# Altium PCB PCB1.PcbDoc
Units mil, origin at the board's own origin, x right, y up, seen from the top; angles counter-clockwise.
Board outline 3740.16 x 1062.99 mil, 2 copper layers (Top Layer, Bottom Layer); 15 components, 7 nets, 35 pads, 0 vias.
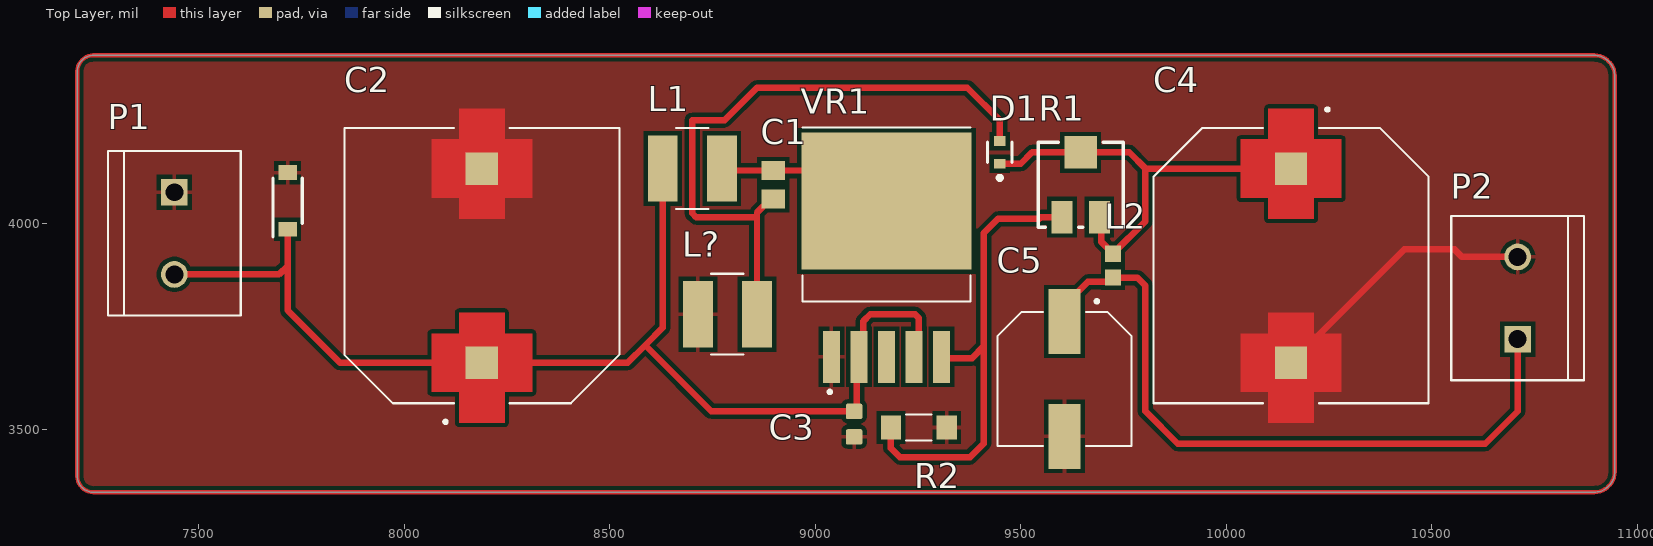
[diagram p0: Top Layer view]
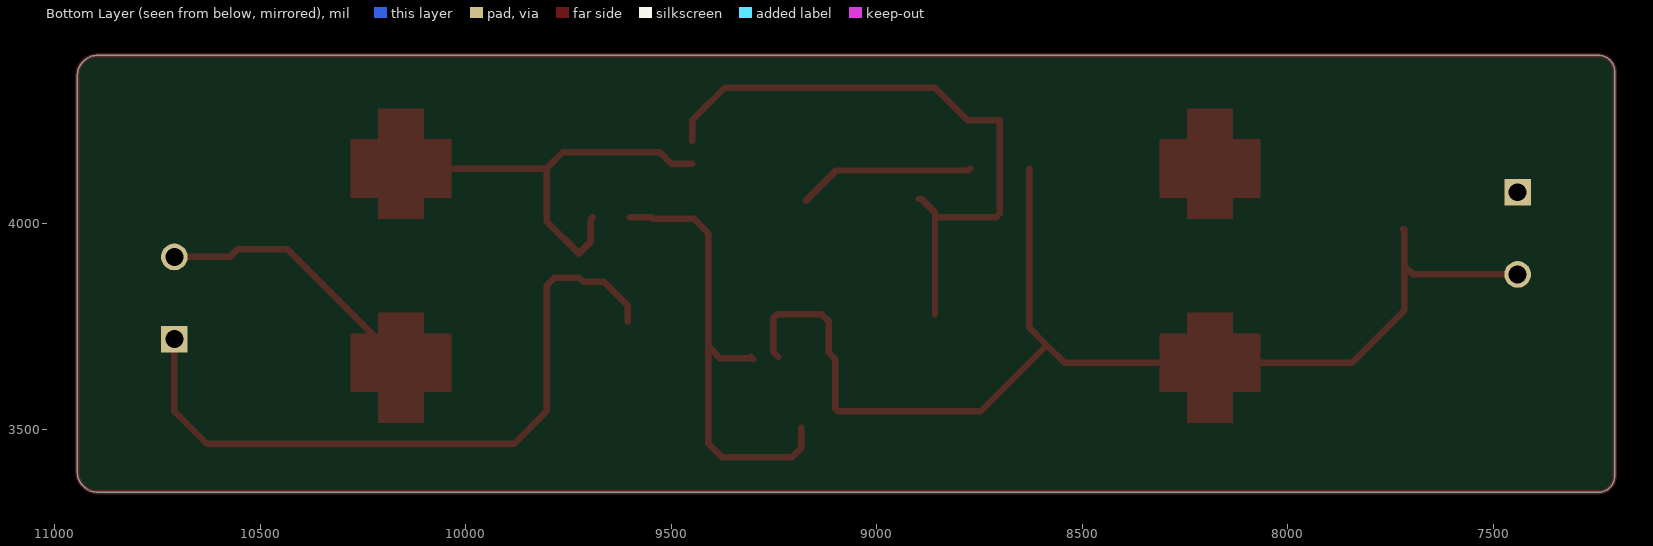
[diagram p1: Bottom Layer view, seen from below]
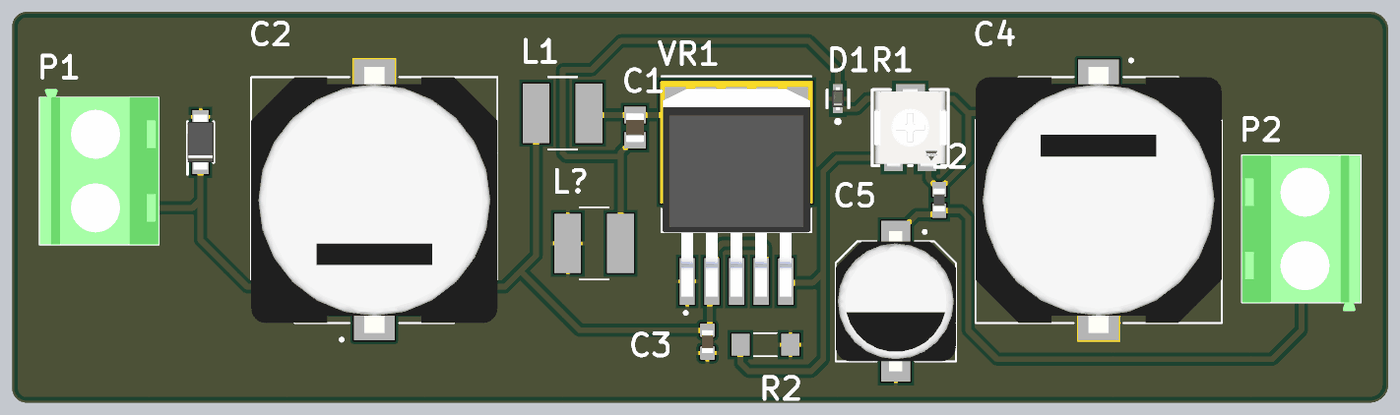
[diagram p2: 3D render of the assembled board from above, using the file's embedded part models]

## Layer stack, top to bottom
Top Solder: solder mask 0.4, Solder Resist, Dk 3.5
Top Layer: signal copper 1.4
Dielectric 1: dielectric 12.6, FR-4, Dk 4.8
Bottom Layer: signal copper 1.4
Bottom Solder: solder mask 0.4, Solder Resist, Dk 3.5

## Board outline
7204.72,3385.83 ccw(c7244.09,3385.83) 7244.09,3346.46 10894.88,3346.46 ccw(c10894.88,3396.46) 10944.88,3396.46 10944.88,4359.45 ccw(c10894.88,4359.45) 10894.88,4409.45 7244.09,4409.45 ccw(c7244.09,4370.08) 7204.72,4370.08

## Design rules (kind name [scope] priority, off if disabled: settings)
Clearance [All] p1: gap=10 ignorepadtopadclearanceinfootprint=FALSE
PolygonConnect [All] p1: connectstyle=Relief reliefconductorwidth=10 reliefentries=4 polygonreliefangle="90 Angle" airgapwidth=10
RoutingVias [All] p1: holewidth=28 width=50 viastyle="Through Hole" minholewidth=19.68 minwidth=50 maxholewidth=39.37 maxwidth=50
SolderMaskExpansion [All] p1: expansion=4 istentingtop=FALSE
Width [All] p1: maxlimit=29.92 minlimit=10 preferedwidth=15.75
30 further rules are at their usual default settings.

## Components (designator, comment, footprint, x,y, rotation, side; value= is the part's Value field where it differs from the comment)
C1 "C2012X7S2A105M125AB" CAPC2012X145N 8897.64,4094.49 r270 top
C2 "EEVFK1V102V" CAP_EEVFK1V102V 8188.98,3897.64 r90 top
C3 "MBJCG168BB7104KTPA18" CAPC1608X100N 9094.49,3512.2 r270 top
C4 "EEVFK1V102V" CAP_EEVFK1V102V 10157.48,3897.64 r270 top
C5 "EEEFK1V101GL" CAP_EEEFK1V101GL 9606.3,3622.05 r270 top
D1 "SDM20U30-7" FP-SOD523-MFG 9448.82,4173.23 r90 top value=20pF
L1 "LQH5BPH330MT0L" IND_LQH5BPH330MT0L 8700.79,4133.86 r0 top
L2 "LQM18DN100M70L" INDC1608X95N 9724.41,3897.64 r270 top
L? "LQH5BPH330MT0L" IND_LQH5BPH330MT0L 8786.42,3779.53 r0 top
P1 "282837-2" TE_282837-2 7440.94,3976.38 r270 top
P2 "282837-2" TE_282837-2 10708.66,3818.9 r90 top
R1 "TS53YJ203MR10" FP-TS53YJ-MFG 9645.67,4094.49 r0 top
R2 "ERA8ARW222V" RES_ERA8ARW222V 9251.97,3503.94 r180 top
VR1 "XL6009" DPAK170P1435X465-6N 9173.23,3917.32 r90 top
? "1N4007W-T" SODFL3818X130N 7716.54,4055.12 r90 top

## Footprints (in the part's own frame and the unit in brackets; to place one, negate y for a bottom-side part, rotate by r counter-clockwise, add the part's x,y. Pads: shape width x height; smd on the part's side, far side on the other; paste and mask are expansions set on the pad)
CAP_EEEFK1V101GL [mm]
  rect 4x2 smd: 1(-3.55,0) 2(3.55,0)
  silkscreen extent -4.9,-4.15 4.15,4.15, body extent -4.85,-4.15 4.85,4.15, height 10.2
CAP_EEVFK1V102V [mm]
  rect 2x2 smd paste-2 mask+0: 1(-6,0) 2(6,0)
  Top Layer region: -4.2,1.4 -2.9,1.4 -2.9,-1.4 -4.2,-1.4 -4.2,-3.1 -7.8,-3.1 -7.8,-1.4 -9.7,-1.4 -9.7,1.4 -7.8,1.4 -7.8,3.1 -4.2,3.1
  Top Layer region: 7.8,1.4 9.7,1.4 9.7,-1.4 7.8,-1.4 7.8,-3.1 4.2,-3.1 4.2,-1.4 2.9,-1.4 2.9,1.4 4.2,1.4 4.2,3.1 7.8,3.1
  silkscreen extent -9.75,-8.5 8.5,8.5, body extent -9.2,-8.5 9.2,8.5, height 16.8
CAPC1608X100N [mm]
  rrect25% 0.95x1.03 smd: 1(-0.79,0) 2(0.79,0)
  body extent -0.8,-0.4 0.8,0.4, height 1
CAPC2012X145N [mm]
  rect 1.15x1.47 smd: 1(-0.88,0) 2(0.88,0)
  body extent -1,-0.63 1,0.63, height 1.45
DPAK170P1435X465-6N [mm]
  rect 3.21x1.05 smd: 1(-6.13,3.4) 2(-6.13,1.7) 3(-6.13,0) 4(-6.13,-1.7) 5(-6.13,-3.4)
  rect 8.46x10.53 smd paste-6: 6(3.5,0)
  silkscreen extent -8.4,-5.18 8.05,5.18, body extent -7.17,-5.08 7.17,5.08, height 4.65
FP-SOD523-MFG [mm]
  rect 0.6x0.7 smd paste+0 mask+0: 1(-0.7,0) 2(0.7,0)
  silkscreen extent -1.7,-0.75 0.63,0.75, body extent -1.1,-0.53 1.1,0.53, height 0.25
FP-TS53YJ-MFG [mm]
  rect 1.3x2 smd paste+0 mask+0: 1(1.15,-2) 3(-1.15,-2)
  rect 2x2 smd paste+0 mask+0: 2(0,2)
  silkscreen extent -2.63,-2.63 2.63,2.63, body extent -2.73,-3.1 2.73,3.1, height 0.25
IND_LQH5BPH330MT0L [mm]
  rect 1.85x4.1 smd: 1(-1.825,0) 2(1.825,0)
  silkscreen extent -1,-2.5 1,2.5
INDC1608X95N [mm]
  rect 1x0.97 smd: 1(-0.735,0) 2(0.735,0)
  body extent -0.8,-0.4 0.8,0.4, height 0.95
RES_ERA8ARW222V [mm]
  rect 1.25x1.5 smd: 1(-1.725,0) 2(1.725,0)
  silkscreen extent -0.78,-0.8 0.78,0.8
SODFL3818X130N [mm]
  rect 0.92x1.13 smd paste+0 mask+0.102: 1(-1.75,0) 2(1.75,0)
  silkscreen extent -2.21,-0.9 1.4,0.9, body extent -1.9,-0.9 1.9,0.9, height 1.3
TE_282837-2 [mm]
  rect 1.65x1.65 / inner round 1.65 / far side rect 1.65x1.65 hole 1.1: 1(-2.54,0)
  round 1.65 hole 1.1: 2(2.54,0)
  silkscreen extent -5.08,-4.1 5.08,4.1, body extent -5.68,-4.1 5.08,4.1, height 10

## Part data
C1: "1 ÂµF Â±20% 100V Ceramic Capacitor X7S 0805 (2012 Metric)", Package="2012 TDK", Availability="In Stock", Check_prices=https://www.snapeda.com/parts/C2012X7S2A105M125AB/TDK/view-part/?ref=eda, MF=TDK, MP=C2012X7S2A105M125AB, Price=None, Purchase-URL=https://pricing.snapeda.com/search/part/C2012X7S2A105M125AB/?ref=eda, SnapEDA_Link=https://www.snapeda.com/parts/C2012X7S2A105M125AB/TDK/view-part/?ref=snap
C2 C4: "1000ÂµF 35V Aluminum Electrolytic Capacitors Radial, Can - SMD 5000 Hrs @ 105Â°C", Package="RADIAL-2 Panasonic", Availability="In Stock", Check_prices=https://www.snapeda.com/parts/EEV-FK1V102V/Panasonic/view-part/?ref=eda, MF=Panasonic, MP=EEV-FK1V102V, Price=None, Purchase-URL=https://pricing.snapeda.com/search/part/EEV-FK1V102V/?ref=eda, SnapEDA_Link=https://www.snapeda.com/parts/EEV-FK1V102V/Panasonic/view-part/?ref=snap
C3: "0.1uF 35V 10% Multilayer Ceramic Capacitor X7R 0603 (1608 Metric)", Package="1608-2 TAIYO", Check_prices=https://www.snapeda.com/parts/MBJCG168BB7104KTPA18/Taiyo+Yuden/view-part/?ref=eda, MF="Taiyo Yuden", MP=MBJCG168BB7104KTPA18, SnapEDA_Link=https://www.snapeda.com/parts/MBJCG168BB7104KTPA18/Taiyo+Yuden/view-part/?ref=snap
C5: "CAP ALUM 100UF 20% 35V SMD", Package="RADIAL-2 Panasonic", Check_prices=https://www.snapeda.com/parts/EEEFK1V101GL/Panasonic/view-part/?ref=eda, MF=Panasonic, MP=EEEFK1V101GL, SnapEDA_Link=https://www.snapeda.com/parts/EEEFK1V101GL/Panasonic/view-part/?ref=snap
D1: library part CMP-12790-000053-1, "DIODE SCHOTTKY 30V 200MA SOD523", Capacitance=20pF, Forward Current=200mA, Manufacturer="Diodes Inc.", Max Junction Temp=+125°C, Max Repetitive Reverse Voltage=30V, Max Surge Forward Current=1A, Package=SOD523, Peak Reverse Current=150uA, Temperature="-65°C to +125°C", Temperature Range Low=-65°C, Automotive=Yes, Automotive Grade="Grade 1", Category=Diode, ComponentLink2Description=Datasheet, ComponentLink2URL=https://www.diodes.com/assets/Datasheets/ds30397.pdf, Device Class L1="Discrete Semiconductors", Device Class L2=Diodes, Device Class L3="Schottky Diodes", Digikey Description="DIODE SCHOTTKY 30V 200MA SOD523", Footprint Url=https://www.diodes.com/assets/Package-Files/SOD523.pdf, Height=0.65mm, Lead Free=Yes, Manufacturer Part Number=SDM20U30-7, Mouser Description="SDM20U30 Series 20 V 200 mA Surface Mount Schottky Barrier Diode - SOD-523", Octopart=https://octopart.com/sdm20u30-7-diodes+inc.-333874, Reverse Voltage=30V, RoHS=TRUE, Temperature Range High=+125°C
L1 L?: "Inductor Power Chip Shielded Wirewound 4.7uH 30% 100KHz Ferrite 2A 0.0696Ohm DCR 2020 Automotive T/R", Package=None, Availability=Unavailable, MP=LQH5BPH330MT0L, Price=None
L2: "Inductor with Inductance 10uH Tol.+/-20% Package 0603 (1608)", Package="0603 Murata", Check_prices=https://www.snapeda.com/parts/LQM18DN100M70L/Murata/view-part/?ref=eda, MF="Murata Electronics", MP=LQM18DN100M70L, SnapEDA_Link=https://www.snapeda.com/parts/LQM18DN100M70L/Murata/view-part/?ref=snap
P1 P2: "Ð Ð°Ð·ÑŠÐµÐ¼Ð½Ñ‹Ðµ ÐºÐ»ÐµÐ¼Ð¼Ð½Ñ‹Ðµ ÐºÐ¾Ð»Ð¾Ð´ÐºÐ¸ Ð Ð¾Ð·ÐµÑ‚ÐºÐ° 2 Ð¿Ð¾Ð»Ð¾Ð¶ÐµÐ½Ð¸Ñ 5,08 Ð¼Ð¼ ÐŸÑ€Ð¸Ð¿Ð¾Ð¹ Ð¿Ñ€ÑÐ¼Ð¾Ð¹ Ñ‡ÐµÑ€ÐµÐ· Ð¾Ñ‚Ð²ÐµÑ€ÑÑ‚Ð¸Ðµ 13,5 Ð / ÐºÐ¾Ð½Ñ‚Ð°ÐºÑ‚", Package=None, Availability="In Stock", Check_prices=https://www.snapeda.com/parts/282837-2/TE+Connectivity+AMP+Connectors/view-part/?ref=eda, MF="TE Connectivity", MP=282837-2, Price=None, Purchase-URL=https://pricing.snapeda.com/search/part/282837-2/?ref=eda, SnapEDA_Link=https://www.snapeda.com/parts/282837-2/TE+Connectivity+AMP+Connectors/view-part/?ref=snap
R1: library part CMP-02410-000009-1, "TRIMMER 20K OHM 0.25W J LEAD TOP", Max Operating Temperature=125°C, Max Power Dissipation=250mW, Min Operating Temperature=-55°C, Package Quantity=1, Resistance=20kR, Resistance Tolerance=20%, Resistor Type=Cermet, Temperature Coefficient=100ppm/°C, Depth=5.5mm, Height=0.106inch, Length=5mm, Military Standard=Not, Mount="Surface Mount", Number of Turns=1, Packaging="Tape and Reel", Power Rating=250mW, Radiation Hardening=No, RoHS Compliant=Yes, Series=TS53Y, Taper=Linear, Technology=CERMET, Termination=SMD/SMT, Tolerance=20%, Width=5mm
R2: Package=None, Availability=Unavailable, MP=ERA8ARW222V, Price=None
VR1: "The XL6009 regulator is a wide input range, current mode, DC/DC converter which is capable of generating either positive or negative output voltages.", Package="TO-263-5L XLSEMI", Availability="Not in stock", Check_prices=https://www.snapeda.com/parts/XL6009/XLSEMI/view-part/?ref=eda, MF=XLSEMI, MP=XL6009, Price=None, SnapEDA_Link=https://www.snapeda.com/parts/XL6009/XLSEMI/view-part/?ref=snap
?: "Diode Standard 1000 V 1A Surface Mount SOD-123F", Package=Package, Check_prices=https://www.snapeda.com/parts/1N4007W/Rectron/view-part/?ref=eda, MF="Rectron USA", MP=1N4007W, SnapEDA_Link=https://www.snapeda.com/parts/1N4007W/Rectron/view-part/?ref=snap

## Nets (pads, with @x,y where several pads share a name; then routed paths per layer and width w, separated by ;. In a path a pad name is that pad's centre, name@x,y a point inside that pad or via, vN(x,y) a via of type N, cw(c..) or ccw(c..) an arc to the next point about the centre after c; other vN are vias at no path point)
GND: ?.2 C2.2 C3.2 C4.2 C5.2 L?.1 P1.1 P2.2 R2.1 VR1.1 | length 672.8
  Top Layer w15.75: C4.2 10433.07,3937.01 10555.15,3937.01 10573.26,3918.9 P2.2
"Net _1": ?.1 C2.1 C3.1 L1.1 P1.2 VR1.2 VR1.4 | length 2922.1
  Top Layer w15.75: P1.2 7695.28,3876.38 7716.54,3897.64 ; ?.1@7720.67,3986.22 ?.1 7716.54,3897.64 ; L1.1 8628.94,3747.05 8586.12,3704.23 ; VR1.4 9251.97,3687.8 9251.97,3770.3 9242.74,3779.53 9133.86,3779.53 9117.13,3762.8 9117.13,3686.81 VR1.2 9100.39,3670.08 9100.39,3549.21 C3.1 8747.05,3543.31 8586.12,3704.23 ; 7716.54,3897.64 7716.54,3788.75 7843.87,3661.42 C2.1 8543.31,3661.42 8586.12,3704.23
NetC1_1: C1.1 L1.2 VR1.6 | length 433.2
  Top Layer w15.75: L1.2 8777.36,4129.13 C1.1 9099.21,4129.13 VR1.6
NetC1_2: C1.2 D1.2 L?.2 | length 1553.1
  Top Layer w15.75: L?.2 8858.27,4015.75 ; C1.2 8891.34,4059.84 8858.27,4026.77 8858.27,4015.75 ; D1.2 9448.82,4251.97 9370.08,4330.71 8858.27,4330.71 8779.53,4251.97 8700.79,4251.97 8700.79,4024.97 8710.01,4015.75 8858.27,4015.75
NetC4_1: C4.1 D1.1 L2.1 R1.1 R1.2 | length 1078.7
  Top Layer w15.75: D1.1 9500,4145.67 9527.56,4173.23 R1.2 9763.78,4173.23 9803.15,4133.86 ; R1.1 9695.32,4011.38 9695.32,3956.26 L2.1@9724.41,3927.17 ; L2.1 L2.1@9724.41,3927.17 ; C4.1 9803.15,4133.86 ; L2.1@9724.41,3927.17 9803.15,4005.91 9803.15,4133.86
NetC5_1: C5.1 L2.2 P2.1 | length 1749.4
  Top Layer w15.75: C5.1 9606.3,3801.18 9663.39,3858.27 9713.98,3858.27 L2.2 ; L2.2@9725,3868.7 9783.49,3868.7 9803.15,3849.04 9803.15,3543.31 9881.89,3464.57 10629.92,3464.57 10708.66,3543.31 P2.1 P2.1@10726.77,3700.79
NetR1_3: R1.3 R2.2 VR1.5 | length 1143.9
  Top Layer w15.75: R2.2 9184.06,3453.74 9206.08,3431.72 9376.6,3431.72 9409.45,3464.57 9409.45,3700.79 ; VR1.5@9300.56,3669.46 VR1.5@9303.83,3672.72 ; VR1.5 VR1.5@9303.83,3672.72 ; R1.3 9548.82,4015.75 9545.32,4012.24 9445.32,4012.24 9409.45,3976.38 9409.45,3700.79 ; VR1.5@9303.83,3672.72 9381.38,3672.72 9409.45,3700.79
pads on no net: VR1.3
copper on no net: | length 9529.6
  Top Layer w10: 7204.72,3385.83 ccw(c7244.09,3385.83) 7244.09,3346.46 10894.88,3346.46 ccw(c10894.88,3396.46) 10944.88,3396.46 10944.88,4359.45 ccw(c10894.88,4359.45) 10894.88,4409.45 7244.09,4409.45 ccw(c7244.09,4370.08) 7204.72,4370.08 7204.72,3385.83

## Polygon pours and split planes (outlines as drawn)
GND on Top Layer "GND_L01_P004" (solid, pour order 4): 7219.09,3355.41 ccw(c7244.09,3385.83) 7244.09,3346.46 10894.88,3346.46 ccw(c10894.88,3396.46) 10944.88,3396.46 10944.88,4359.45 ccw(c10894.88,4359.45) 10894.88,4409.45 7244.09,4409.45 ccw(c7244.09,4370.08) 7219.09,4400.49